# Altium PCB pcb 2022 prototip_2022-08-15.pcbdoc (part 1 of 2)
Units mm, origin at the board's own origin, x right, y up, seen from the top; angles counter-clockwise.
Board outline 345.4 x 226.4 mm, 2 copper layers (Top Layer, Bottom Layer); 44 components, 59 nets, 156 pads, 0 vias.
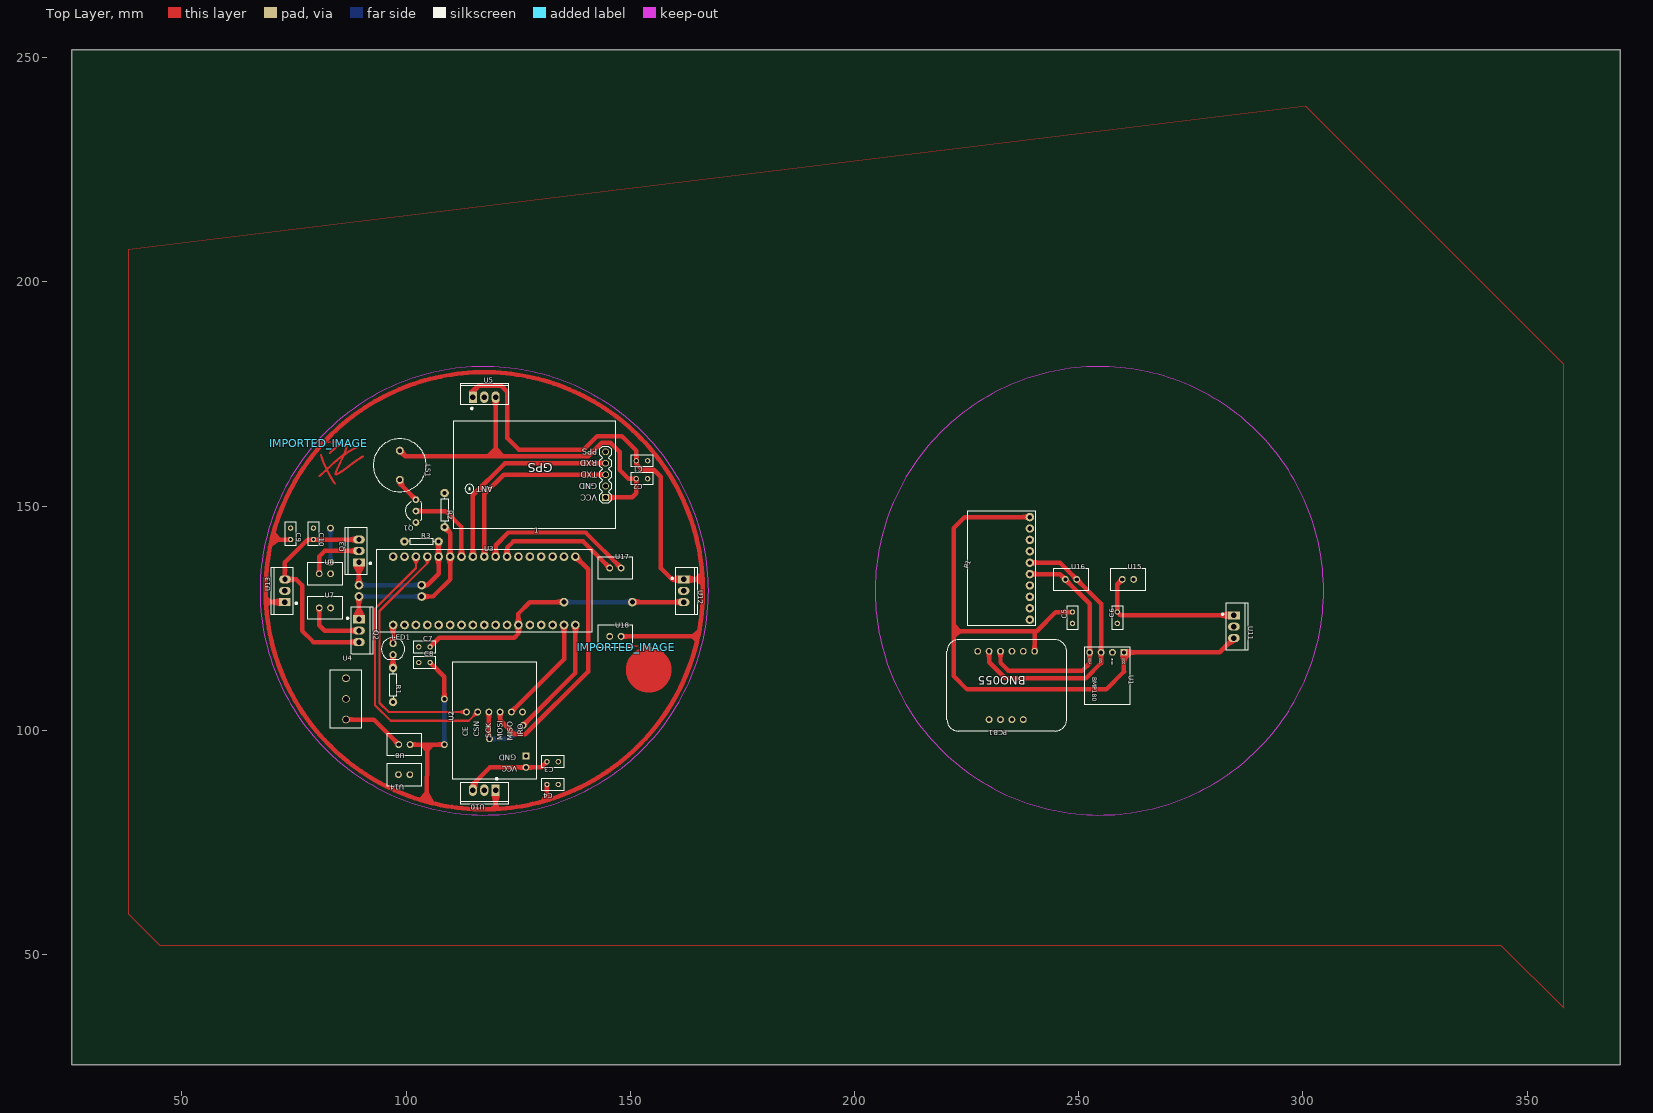
[diagram p0: Top Layer view]
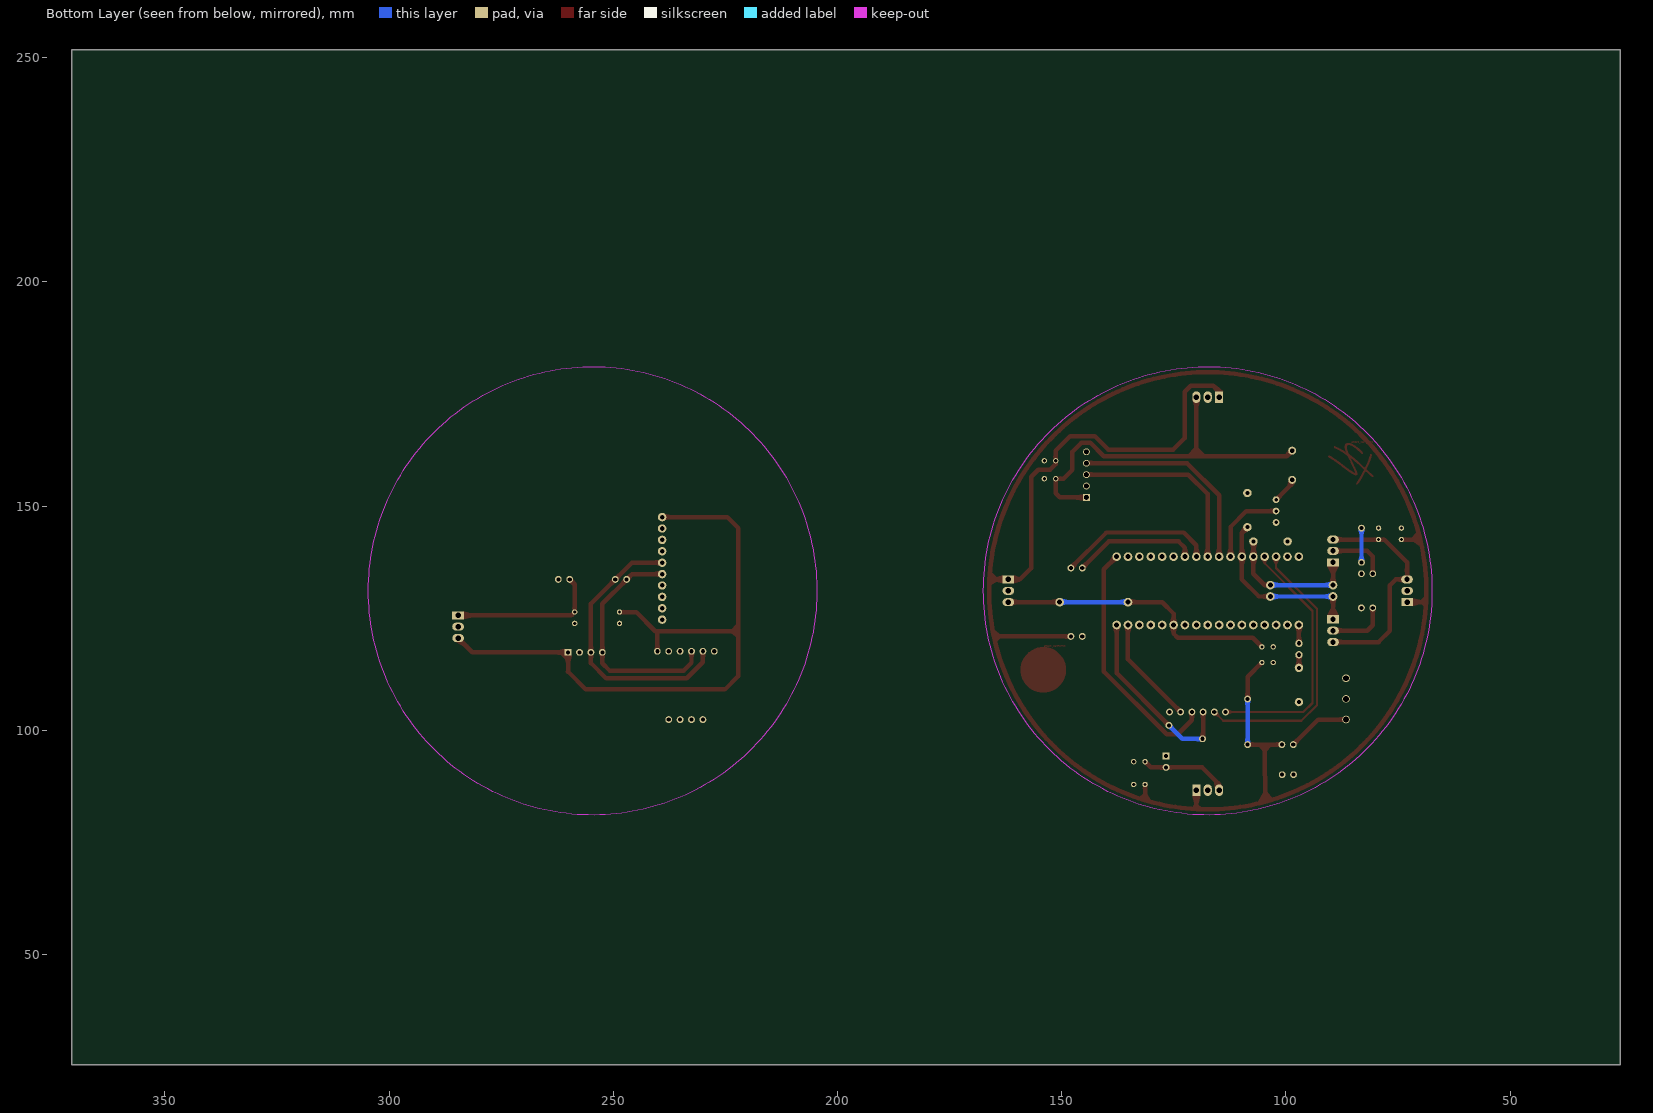
[diagram p1: Bottom Layer view, seen from below]

## Layer stack, top to bottom
Top Layer: signal copper (thickness not stored)
Dielectric: dielectric 0.32, FR-4, Dk 4.8
Bottom Layer: signal copper (thickness not stored)

## Board outline
370.8,25.4 25.4,25.4 25.4,251.8 370.8,251.8

## Components (designator, comment, footprint, x,y, rotation, side; value= is the part's Value field where it differs from the comment)
1 "GPS-RECEIVER-NEO6M" "GPS FOOTPRINT" 130.14,159.04 r180 top
C1 "0.33uf" RAD-0.1 152.6,160.1 r180 top
C2 "0.1uf" RAD-0.1 152.6,156.1 r180 top
C3 "0.1uf" RAD-0.1 132.68,93 r180 top
C4 "0.33uf" RAD-0.1 132.68,87.92 r180 top
C5 "0.1uf" RAD-0.1 248.6,125.1 r90 top
C6 "0.33uf" RAD-0.1 258.6,125.1 r90 top
C7 "0.1uf" RAD-0.1 104.1,118.6 r0 top
C8 "0.33uf" RAD-0.1 104.1,115.1 r0 top
C9 "0.33uf" RAD-0.1 74.26,143.8 r270 top
C10 "0.1uf" RAD-0.1 79.34,143.8 r270 top
IMPORTED_IMAGE "IMPORTED_IMAGE" IMPORTED_IMAGE#1 149.113,118.483 r0 top
IMPORTED_IMAGE "IMPORTED_IMAGE" IMPORTED_IMAGE#2 80.572,164.024 r0 top
LED1 "LED-TH-5mm_R" LED-TH_BD5.0_RED 97.1,118.1 r0 top
LS1 "BUZZER-PTH" BUZZER-12MM 98.6,159.1 r270 top
P1 "MPU6050 COPY" MPU6050 239.1,136.1 r90 top
PCB1 "BNO055" "BNO FOOTPRINT" 235.6,108.6 r180 top
Q1 "Transistor, PN2222A" GENERIC_TO-92 102.2,148.88 r180 top
Q2 "IRFZ44NPBF" TO-220-3_L10.0-W4.5-P2.54-L 89.5,122.21 r270 top
Q3 "IRFZ44NPBF" TO-220-3_L10.0-W4.5-P2.54-L 89.5,139.99 r90 top
R1 "1k" R_AXIAL-0.3 97.1,110.1 r270 top
R2 "10k" R_AXIAL-0.3 108.6,149.1 r270 top
R3 "10k" R_AXIAL-0.3 103.44,142.1 r0 top
U1 "BMP180" "BMP180 FOOTPRINT" 257.14,113.32 r270 top
U2 "NRF24L01_adapter3V3" NRF24L01_ADAPTER3V3 119.726,97.826 r90 top
U3 "ARDUINOMICRO" ARDUINOMICRO 117.44,131.1 r0 top
U4 "swich" NEW_FOOTPRINT 86.6,111.6 r0 top
U5 "LM7805" TO-220-3_L10.0-W4.5-P2.54-L 117.44,174.28 r0 top
U6 "eyleyici1" "JST- XH 2.54MM SOKET 2LI" 81.88,134.91 r0 top
U7 "eyleyici2" "JST- XH 2.54MM SOKET 2LI" 81.88,127.29 r0 top
U8 "pil" "JST- XH 2.54MM SOKET 2LI" 99.66,96.81 r180 top
U10 "LM7805" TO-220-3_L10.0-W4.5-P2.54-L 117.44,86.65 r180 top
U11 "LM7805" TO-220-3_L10.0-W4.5-P2.54-L 284.6,123.1 r270 top
U12 "LM7805" TO-220-3_L10.0-W4.5-P2.54-L 161.89,131.1 r270 top
U13 "LM7805" TO-220-3_L10.0-W4.5-P2.54-L 72.99,131.1 r90 top
U14 "gnd" "JST- XH 2.54MM SOKET 2LI" 99.6,90.1 r180 top
U15 "pil" "JST- XH 2.54MM SOKET 2LI" 260.95,133.64 r0 top
U16 "gnd" "JST- XH 2.54MM SOKET 2LI" 248.25,133.64 r0 top
U17 "eyleyici1" "JST- XH 2.54MM SOKET 2LI" 146.65,136.18 r0 top
U18 "eyleyici1" "JST- XH 2.54MM SOKET 2LI" 146.65,120.94 r0 top
? "" ? 81.442,112.551 r0 top
? "" ? 94.107,109.3 r0 top
? "" ? 78.537,104.7 r0 top
? "" ? 90.082,101.45 r0 top

## Footprints (in the part's own frame and the unit in brackets; to place one, negate y for a bottom-side part, rotate by r counter-clockwise, add the part's x,y. Pads: shape width x height; smd on the part's side, far side on the other; paste and mask are expansions set on the pad)
ARDUINOMICRO [mil]
  round 76 hole 43.4: P$1(-800,300) P$2(-700,300) P$3(-600,300) P$4(-500,300) P$5(-400,300) P$6(-300,300) P$7(-200,300) P$8(-100,300) P$9(0,300) P$10(100,300) P$11(200,300) P$12(500,-300) P$13(400,-300) P$14(500,300) P$15(600,300) P$16(700,300) P$17(800,300) P$18(800,-300) P$19(700,-300) P$20(600,-300) P$21(300,300) P$22(400,300) P$23(300,-300) P$24(200,-300) P$25(100,-300) P$26(0,-300) P$27(-100,-300) P$28(-200,-300) P$29(-300,-300) P$30(-400,-300) P$31(-500,-300) P$32(-600,-300) P$33(-700,-300) P$34(-800,-300)
  silkscreen extent -950,-360 950,360
"BMP180 FOOTPRINT" [mil]
  rect 60x60 hole 36: 1(-160,115)
  round 60 hole 36: 2(-160,15) 3(-160,-85) 4(-160,-185)
  silkscreen extent -210,-229 302,165
"BNO FOOTPRINT" [mil]
  round 60 hole 36: 1(-180,-355) 2(-80,-355) 3(20,-355) 4(120,-355) 5(220,-355) 6(320,-355) 7(-80,245) 8(20,245) 9(120,245) 10(220,245)
  silkscreen extent -460,-455 590,345
BUZZER-12MM [mil]
  round 70 hole 35.44 slot 35.45 at 0 deg: +(127.95,0) -(-127.95,0)
  silkscreen extent -232,-232 232,232
GENERIC_TO-92 [mil]
  round 60 hole 30: 1(0,100) 2(0,0) 3(0,-100)
  silkscreen extent -50,-80 93,80
"GPS FOOTPRINT" [mil]
  rect 59.37x59.37 hole 39.36: 1(-565,280)
  round 59.37 hole 39.36: 2(-565,180) 3(-565,80) 4(-565,-20) 5(-565,-120)
  silkscreen extent -650,-395 770,555
IMPORTED_IMAGE#1 [mm]
  Top Layer region: 574 vertices and 1 holes, not listed, extent 0,-10 10,0
  Top Layer region: 4.678,-9.475 4.637,-9.488 4.637,-9.451 4.637,-9.446 4.639,-9.439 4.641,-9.431 4.644,-9.421 4.649,-9.409 4.654,-9.396 4.659,-9.382 4.666,-9.367 4.673,-9.35 4.681,-9.333 4.689,-9.315 4.697,-9.296 4.707,-9.276 4.716,-9.257 4.726,-9.237 4.736,-9.216 4.836,-9.019 4.766,-8.858 4.752,-8.824 4.737,-8.79 4.722,-8.756 4.709,-8.723 4.696,-8.692 4.684,-8.665 4.675,-8.641 4.668,-8.623 4.638,-8.548 4.757,-8.548 4.837,-8.723 4.917,-8.898 4.928,-8.723 4.94,-8.548 5.036,-8.548 5.036,-8.689 5.036,-8.715 5.035,-8.746 5.034,-8.783 5.032,-8.824 5.03,-8.87 5.028,-8.918 5.026,-8.968 5.023,-9.019 5.02,-9.071 5.017,-9.123 5.014,-9.157 4.993,-9.482 4.903,-9.482 4.902,-9.132 4.811,-9.297 4.72,-9.461
  Top Layer region: 5.506,-9.447 5.485,-9.414 5.478,-9.397 5.47,-9.365 5.461,-9.32 5.45,-9.266 5.439,-9.203 5.428,-9.133 5.416,-9.06 5.405,-8.984 5.394,-8.909 5.384,-8.836 5.376,-8.767 5.368,-8.704 5.363,-8.65 5.36,-8.606 5.359,-8.574 5.36,-8.558 5.375,-8.518 5.481,-8.505 5.503,-8.502 5.527,-8.499 5.552,-8.496 5.576,-8.494 5.6,-8.491 5.622,-8.489 5.642,-8.487 5.659,-8.486 5.731,-8.481 5.749,-8.539 5.752,-8.552 5.756,-8.574 5.762,-8.602 5.768,-8.637 5.775,-8.677 5.782,-8.722 5.791,-8.771 5.799,-8.824 5.808,-8.879 5.817,-8.936 5.822,-8.975 5.879,-9.352 5.849,-9.38 5.845,-9.383 5.84,-9.386 5.833,-9.389 5.825,-9.392 5.816,-9.395 5.806,-9.398 5.794,-9.402 5.782,-9.405 5.769,-9.408 5.755,-9.411 5.741,-9.414 5.726,-9.417 5.71,-9.42 5.695,-9.423 5.679,-9.425 5.662,-9.427 hole: 1546682.439,1091336.789 1548529.273,1091608.569 1548529.273,1091608.569 1547547.817,1098899.385 1547547.817,1098899.385 1547194.249,1098860.777 1547194.249,1098860.777 1547111.295,1098849.86 1547111.295,1098849.86 1547010.913,1098833.639 1547010.913,1098833.639 1546896.94,1098812.905 1546896.94,1098812.905 1546773.212,1098788.451 1546773.212,1098788.451 1546643.568,1098761.067 1546643.568,1098761.067 1546511.842,1098731.547 1546511.842,1098731.547 1546381.873,1098700.681 1546381.873,1098700.681 1546257.497,1098669.261 1546257.497,1098669.261 1545674.567,1098516.607 1545674.567,1098516.607 1545674.567,1098151.101 1545674.567,1098151.101 1545676.365,1098102.442 1545676.365,1098102.442 1545690.219,1097943.424 1545690.219,1097943.424 1545716.568,1097710.898 1545716.568,1097710.898 1545753.995,1097415.375 1545753.995,1097415.375 1545801.085,1097067.365 1545801.085,1097067.365 1545856.42,1096677.377 1545856.42,1096677.377 1545918.583,1096255.923 1545918.583,1096255.923 1545986.157,1095813.513 1545986.157,1095813.513 1546205.379,1094418.124 1546205.379,1094418.124 1546408.577,1093118.059 1546408.577,1093118.059 1546525.467,1092363.457 1546525.467,1092363.457 1546682.439,1091336.789
  Top Layer region: 4.187,-9.405 3.9,-9.344 3.928,-9.265 4.133,-9.282 4.19,-8.998 4.095,-8.972 3.999,-8.945 4.026,-8.865 4.217,-8.865 4.24,-8.781 4.245,-8.763 4.249,-8.743 4.254,-8.722 4.258,-8.701 4.261,-8.68 4.264,-8.66 4.266,-8.641 4.267,-8.625 4.27,-8.552 4.092,-8.531 4.062,-8.439 4.224,-8.463 4.288,-8.473 4.342,-8.483 4.38,-8.491 4.397,-8.497 4.398,-8.509 4.394,-8.539 4.388,-8.583 4.378,-8.639 4.365,-8.706 4.351,-8.779 4.335,-8.858 4.318,-8.939 4.301,-9.02 4.283,-9.099 4.267,-9.173 4.251,-9.24 4.237,-9.297 4.225,-9.342 4.215,-9.372 4.209,-9.385
  Top Layer region: 6.487,-9.226 6.339,-9.277 6.309,-9.238 6.305,-9.233 6.301,-9.226 6.297,-9.218 6.292,-9.208 6.287,-9.197 6.281,-9.185 6.275,-9.171 6.269,-9.157 6.263,-9.142 6.257,-9.125 6.251,-9.109 6.244,-9.091 6.238,-9.073 6.231,-9.055 6.225,-9.036 6.219,-9.018 6.16,-8.837 6.264,-8.761 6.131,-8.604 5.998,-8.448 6.019,-8.414 6.04,-8.391 6.063,-8.381 6.072,-8.385 6.087,-8.398 6.107,-8.417 6.13,-8.442 6.157,-8.472 6.185,-8.505 6.215,-8.542 6.245,-8.58 6.275,-8.618 6.304,-8.656 6.33,-8.692 6.354,-8.725 6.374,-8.755 6.389,-8.78 6.399,-8.799 6.402,-8.811 6.402,-8.848 6.302,-8.848 6.302,-8.893 6.303,-8.904 6.305,-8.919 6.309,-8.937 6.313,-8.956 6.319,-8.977 6.325,-9 6.332,-9.022 6.339,-9.045 6.376,-9.151 6.447,-9.129 6.476,-9.12 6.501,-9.111 6.519,-9.103 6.529,-9.098 6.529,-9.096 6.528,-9.089 6.526,-9.078 6.522,-9.065 6.517,-9.048 6.511,-9.028 6.505,-9.005 6.497,-8.979 6.488,-8.951 6.478,-8.921 6.468,-8.889 6.457,-8.855 6.445,-8.82 6.432,-8.783 6.419,-8.744 6.406,-8.705 6.274,-8.32 6.294,-8.3 6.305,-8.293 6.318,-8.288 6.333,-8.287 6.347,-8.29 6.379,-8.301 6.524,-8.711 6.669,-9.121 6.652,-9.148 6.65,-9.151 6.646,-9.155 6.64,-9.159 6.634,-9.163 6.626,-9.167 6.617,-9.172 6.608,-9.177 6.597,-9.183 6.585,-9.188 6.573,-9.193 6.56,-9.199 6.546,-9.204 6.532,-9.21 6.517,-9.216 6.502,-9.221
  Top Layer region: 3.571,-9.181 3.571,-9.215 3.53,-9.215 3.525,-9.215 3.519,-9.214 3.512,-9.213 3.503,-9.211 3.493,-9.209 3.483,-9.206 3.472,-9.203 3.46,-9.199 3.447,-9.195 3.433,-9.191 3.42,-9.187 3.405,-9.182 3.391,-9.177 3.376,-9.172 3.362,-9.166 3.347,-9.161 3.204,-9.106 3.204,-9.014 3.279,-9.032 3.354,-9.05 3.466,-8.74 3.489,-8.677 3.512,-8.614 3.534,-8.555 3.554,-8.5 3.572,-8.451 3.587,-8.409 3.599,-8.377 3.607,-8.356 3.619,-8.329 3.632,-8.309 3.646,-8.294 3.661,-8.284 3.676,-8.281 3.691,-8.284 3.705,-8.293 3.717,-8.309 3.735,-8.337 3.589,-8.718 3.443,-9.098 3.507,-9.122 3.531,-9.134 3.552,-9.15 3.566,-9.166
  Top Layer region: 2.62,-8.812 2.463,-8.71 2.305,-8.607 2.345,-8.542 2.417,-8.56 2.488,-8.578 2.704,-8.246 2.778,-8.134 2.835,-8.049 2.88,-7.988 2.914,-7.948 2.939,-7.926 2.958,-7.921 2.974,-7.929 2.989,-7.949 3.011,-7.985 2.789,-8.319 2.567,-8.654 2.627,-8.699 2.688,-8.743
  Top Layer region: 7.509,-8.687 7.518,-8.731 7.417,-8.731 7.105,-8.402 6.792,-8.073 6.884,-8.016 6.954,-8.083 7.025,-8.149 7.08,-8.128 7.091,-8.123 7.101,-8.118 7.11,-8.112 7.117,-8.106 7.123,-8.1 7.127,-8.093 7.13,-8.085 7.132,-8.077 7.133,-8.068 7.132,-8.058 7.13,-8.047 7.126,-8.035 7.122,-8.023 7.116,-8.009 7.109,-7.993 7.1,-7.977 7.065,-7.912 7.086,-7.879 7.095,-7.866 7.108,-7.856 7.121,-7.849 7.133,-7.846 7.16,-7.846 7.33,-8.245 7.364,-8.326 7.397,-8.403 7.426,-8.474 7.453,-8.539 7.475,-8.594 7.492,-8.638 7.504,-8.67 hole: 1563093.887,1100995.647 1564356.521,1099734.029 1564356.521,1099734.029 1563812.707,1101069.561 1563812.707,1101069.561 1563584,1101606.835 1563584,1101606.835 1563363.413,1102082.386 1563363.413,1102082.386 1563176.02,1102444.59 1563176.02,1102444.59 1563046.897,1102641.821 1563046.897,1102641.821 1562825.155,1102878.295 1562825.155,1102878.295 1561831.507,1102257.265 1561831.507,1102257.265 1563093.887,1100995.647
  Top Layer region: 465 vertices and 2 holes, not listed, extent 1.622,-8.421 8.416,-1.571
  Top Layer region: 8.141,-8.224 8.048,-8.314 7.939,-8.314 7.8,-8.118 7.872,-8.074 7.996,-8.186 8.141,-8.108 8.069,-8.032 7.998,-7.956 7.588,-7.913 7.495,-7.823 7.402,-7.734 7.402,-7.633 7.583,-7.443 7.711,-7.462 7.777,-7.551 7.843,-7.639 7.819,-7.679 7.794,-7.718 7.633,-7.566 7.577,-7.623 7.52,-7.68 7.586,-7.746 7.652,-7.812 8.069,-7.869 8.151,-7.947 8.234,-8.025 8.234,-8.134
  Top Layer region: 2.014,-8.178 1.903,-8.259 1.834,-8.189 2.089,-7.797 2.343,-7.404 2.417,-7.478 2.328,-7.644 2.371,-7.696 2.414,-7.748 2.491,-7.697 2.524,-7.677 2.556,-7.661 2.584,-7.65 2.603,-7.646 2.638,-7.646 2.634,-7.73 2.354,-7.932 2.246,-8.01 2.143,-8.084 2.059,-8.146 hole: 1511265.441,1104147.533 1514332.237,1106411.689 1514332.237,1106411.689 1514242.067,1106724.871 1514242.067,1106724.871 1514178.277,1106856.086 1514178.277,1106856.086 1514070.839,1106981.919 1514070.839,1106981.919 1513934.779,1107088.131 1513934.779,1107088.131 1513785.121,1107160.481 1513785.121,1107160.481 1513418.091,1107283.163 1513418.091,1107283.163 1511265.441,1104147.533
  Top Layer region: 1.94,-7.659 1.592,-7.947 1.557,-7.91 1.522,-7.874 1.652,-7.76 1.702,-7.716 1.74,-7.68 1.764,-7.655 1.769,-7.646 1.763,-7.648 1.75,-7.65 1.731,-7.655 1.708,-7.66 1.68,-7.667 1.649,-7.675 1.616,-7.684 1.58,-7.694 1.405,-7.74 1.368,-7.679 1.389,-7.646 1.4,-7.633 1.415,-7.622 1.433,-7.615 1.451,-7.613 1.456,-7.612 1.463,-7.612 1.471,-7.61 1.481,-7.609 1.491,-7.607 1.503,-7.604 1.516,-7.601 1.53,-7.598 1.545,-7.594 1.56,-7.591 1.576,-7.586 1.593,-7.582 1.609,-7.577 1.627,-7.573 1.644,-7.568 1.661,-7.563 1.829,-7.513 1.934,-7.277 2.039,-7.042 2.072,-7.062 2.086,-7.075 2.095,-7.093 2.101,-7.115 2.104,-7.14 2.102,-7.165 2.097,-7.19 2.088,-7.212 2.075,-7.23 2.071,-7.234 2.067,-7.239 2.063,-7.245 2.059,-7.253 2.054,-7.261 2.049,-7.27 2.043,-7.279 2.038,-7.29 2.032,-7.301 2.027,-7.313 2.021,-7.325 2.015,-7.337 2.009,-7.35 2.003,-7.363 1.998,-7.376 1.992,-7.389 1.941,-7.515 2.088,-7.394 2.235,-7.273 2.274,-7.297 2.281,-7.302 2.287,-7.307 2.292,-7.313 2.295,-7.318 2.296,-7.322 2.296,-7.327 2.295,-7.332 2.294,-7.337 2.291,-7.343 2.287,-7.349 2.283,-7.356 2.277,-7.363 2.27,-7.372 2.261,-7.381 2.252,-7.39 2.241,-7.401 2.229,-7.413 2.215,-7.425 2.2,-7.439 2.183,-7.454 2.165,-7.47 2.145,-7.487 2.124,-7.505 2.088,-7.535 2.049,-7.568 2.005,-7.605
  Top Layer region: 8.568,-7.726 8.419,-7.62 8.323,-7.552 8.205,-7.468 8.089,-7.385 7.872,-7.229 7.87,-7.182 7.87,-7.176 7.871,-7.17 7.873,-7.163 7.876,-7.155 7.879,-7.146 7.883,-7.136 7.888,-7.126 7.893,-7.116 7.899,-7.105 7.906,-7.094 7.913,-7.082 7.92,-7.07 7.928,-7.058 7.936,-7.047 7.944,-7.035 7.953,-7.023 8.038,-6.912 8.132,-6.912 8.465,-7.154 8.798,-7.396 8.801,-7.479 8.759,-7.478 8.753,-7.477 8.744,-7.473 8.732,-7.468 8.718,-7.46 8.701,-7.45 8.682,-7.438 8.66,-7.425 8.637,-7.41 8.611,-7.394 8.585,-7.376 8.557,-7.357 8.527,-7.337 8.497,-7.315 8.465,-7.293 8.433,-7.271 8.401,-7.247 8.084,-7.017 7.97,-7.162 8.025,-7.203 8.11,-7.265 8.248,-7.366 8.351,-7.44 8.641,-7.652
  Top Layer region: 1.105,-7.312 1.106,-7.229 1.464,-7.006 1.536,-6.961 1.606,-6.919 1.671,-6.881 1.729,-6.847 1.779,-6.82 1.819,-6.799 1.848,-6.785 1.863,-6.78 1.905,-6.778 1.905,-6.874 1.542,-7.093 1.468,-7.137 1.398,-7.178 1.333,-7.215 1.275,-7.248 1.225,-7.275 1.185,-7.295 1.157,-7.308 1.142,-7.312
  Top Layer region: 98 vertices and 1 holes, not listed, extent 8.206,-6.978 9.186,-6.284
  Top Layer region: 0.892,-6.823 0.87,-6.82 0.857,-6.81 0.849,-6.793 0.838,-6.757 1.038,-6.611 1.116,-6.554 1.18,-6.504 1.223,-6.468 1.239,-6.451 1.238,-6.45 1.235,-6.449 1.23,-6.448 1.224,-6.447 1.216,-6.447 1.207,-6.447 1.196,-6.447 1.184,-6.448 1.171,-6.449 1.157,-6.45 1.142,-6.451 1.126,-6.452 1.109,-6.453 1.091,-6.455 1.073,-6.457 1.055,-6.459 1.036,-6.461 1.017,-6.463 0.997,-6.466 0.978,-6.468 0.959,-6.47 0.939,-6.473 0.921,-6.476 0.902,-6.478 0.884,-6.481 0.866,-6.484 0.849,-6.487 0.833,-6.49 0.817,-6.493 0.803,-6.495 0.79,-6.498 0.777,-6.501 0.699,-6.52 0.722,-6.398 1.105,-6.24 1.183,-6.209 1.257,-6.179 1.326,-6.152 1.388,-6.128 1.441,-6.108 1.484,-6.093 1.514,-6.083 1.53,-6.08 1.572,-6.077 1.572,-6.169 1.372,-6.244 1.349,-6.252 1.328,-6.26 1.308,-6.268 1.29,-6.275 1.273,-6.282 1.257,-6.288 1.244,-6.294 1.231,-6.299 1.22,-6.304 1.211,-6.309 1.203,-6.313 1.196,-6.317 1.191,-6.32 1.188,-6.323 1.186,-6.326 1.185,-6.328 1.186,-6.33 1.189,-6.331 1.193,-6.333 1.198,-6.334 1.205,-6.334 1.213,-6.335 1.223,-6.335 1.235,-6.335 1.248,-6.334 1.262,-6.334 1.278,-6.333 1.295,-6.331 1.314,-6.33 1.335,-6.328 1.357,-6.326 1.38,-6.324 1.588,-6.306 1.499,-6.376 1.48,-6.391 1.459,-6.408 1.436,-6.426 1.414,-6.444 1.391,-6.463 1.37,-6.48 1.35,-6.497 1.333,-6.511 1.255,-6.576 1.467,-6.492 1.506,-6.477 1.54,-6.464 1.571,-6.452 1.598,-6.443 1.622,-6.436 1.642,-6.431 1.659,-6.428 1.674,-6.426 1.685,-6.427 1.694,-6.43 1.7,-6.434 1.704,-6.44 1.705,-6.449 1.704,-6.459 1.701,-6.471 1.696,-6.486 1.679,-6.53 1.301,-6.679 1.165,-6.732 1.06,-6.772 0.983,-6.8 0.929,-6.816
  Top Layer region: 9.332,-6.205 9.325,-6.205 9.315,-6.205 9.303,-6.204 9.29,-6.203 9.275,-6.201 9.258,-6.199 9.24,-6.196 9.221,-6.193 9.201,-6.189 9.179,-6.185 9.157,-6.18 9.134,-6.176 9.111,-6.17 9.087,-6.165 9.063,-6.159 8.828,-6.101 8.849,-5.959 8.87,-5.816 8.743,-5.795 8.717,-5.79 8.69,-5.784 8.665,-5.778 8.64,-5.771 8.618,-5.764 8.599,-5.758 8.583,-5.751 8.571,-5.745 8.526,-5.717 8.573,-5.64 8.632,-5.657 8.662,-5.665 8.711,-5.677 8.775,-5.694 8.853,-5.713 8.939,-5.735 9.032,-5.757 9.051,-5.762 9.125,-5.781 9.195,-5.799 9.259,-5.816 9.316,-5.832 9.365,-5.846 9.403,-5.858 9.429,-5.867 9.441,-5.873 9.465,-5.894 9.421,-6.042 9.377,-6.19 9.337,-6.204 hole: 1583748.659,1123558.721 1584028.059,1124000.173 1584028.059,1124000.173 1584136.946,1124203.338 1584136.946,1124203.338 1584226.878,1124430.1 1584226.878,1124430.1 1584288.52,1124652.719 1584288.52,1124652.719 1584312.539,1124843.453 1584312.539,1124843.453 1584317.619,1125245.281 1584317.619,1125245.281 1583068.447,1125593.007 1583068.447,1125593.007 1582805.607,1125662.896 1582805.607,1125662.896 1582537.401,1125728.163 1582537.401,1125728.163 1582271.343,1125787.375 1582271.343,1125787.375 1582014.95,1125839.102 1582014.95,1125839.102 1581775.738,1125881.91 1581775.738,1125881.91 1581561.223,1125914.369 1581561.223,1125914.369 1581378.92,1125935.047 1581378.92,1125935.047 1581236.345,1125942.511 1581236.345,1125942.511 1580653.415,1125944.543 1580653.415,1125944.543 1580653.415,1124775.889 1580653.415,1124775.889 1580661.445,1124756.136 1580661.445,1124756.136 1580685.004,1124731.595 1580685.004,1124731.595 1580723.299,1124702.618 1580723.299,1124702.618 1580775.537,1124669.562 1580775.537,1124669.562 1580840.925,1124632.781 1580840.925,1124632.781 1580918.667,1124592.63 1580918.667,1124592.63 1581007.971,1124549.462 1581007.971,1124549.462 1581108.043,1124503.633 1581108.043,1124503.633 1581218.09,1124455.497 1581218.09,1124455.497 1581337.317,1124405.409 1581337.317,1124405.409 1581464.932,1124353.723 1581464.932,1124353.723 1581600.141,1124300.794 1581600.141,1124300.794 1581742.149,1124246.977 1581742.149,1124246.977 1581890.163,1124192.625 1581890.163,1124192.625 1582043.391,1124138.095 1582043.391,1124138.095 1582201.037,1124083.739 1582201.037,1124083.739 1583748.659,1123558.721
  Top Layer region: 0.539,-5.943 0.539,-5.854 0.98,-5.755 1.422,-5.656 1.445,-5.691 1.469,-5.726 1.445,-5.747 1.432,-5.754 1.404,-5.764 1.364,-5.776 1.314,-5.79 1.255,-5.805 1.19,-5.821 1.12,-5.838 1.047,-5.856 0.974,-5.872 0.902,-5.888 0.833,-5.903 0.769,-5.916 0.713,-5.927 0.665,-5.936 0.629,-5.941 0.605,-5.943
  Top Layer region: 1.012,-5.344 0.869,-5.423 0.679,-5.318 0.489,-5.212 0.489,-4.758 0.656,-4.667 0.676,-4.656 0.696,-4.647 0.715,-4.638 0.734,-4.629 0.753,-4.622 0.772,-4.616 0.791,-4.61 0.809,-4.606 0.827,-4.602 0.845,-4.599 0.863,-4.597 0.88,-4.596 0.898,-4.595 0.915,-4.596 0.932,-4.597 0.949,-4.6 0.966,-4.603 0.983,-4.607 1,-4.612 1.017,-4.618 1.034,-4.625 1.05,-4.633 1.067,-4.641 1.084,-4.651 1.1,-4.661 1.117,-4.672 1.134,-4.684 1.151,-4.698 1.167,-4.712 1.184,-4.727 1.201,-4.742 1.219,-4.759 1.272,-4.813 1.272,-5.165 1.214,-5.215 1.207,-5.221 1.199,-5.227 1.19,-5.234 1.18,-5.241 1.169,-5.249 1.157,-5.257 1.144,-5.265 1.13,-5.274 1.116,-5.283 1.102,-5.292 1.087,-5.301 1.072,-5.31 1.057,-5.319 1.042,-5.328 1.027,-5.336 hole: 1499886.241,1133725.579 1500476.283,1134509.423 1500476.283,1134509.423 1501066.071,1135293.267 1501066.071,1135293.267 1499964.473,1135293.267 1499964.473,1135293.267 1500179.456,1135855.133 1500179.456,1135855.133 1500219.547,1135964.561 1500219.547,1135964.561 1500249.237,1136056.511 1500249.237,1136056.511 1500266.178,1136130.057 1500266.178,1136130.057 1500268.024,1136184.269 1500268.024,1136184.269 1500252.428,1136218.22 1500252.428,1136218.22 1500237.356,1136227.308 1500237.356,1136227.308 1500217.044,1136230.982 1500217.044,1136230.982 1500191.197,1136229.127 1500191.197,1136229.127 1500159.524,1136221.627 1500159.524,1136221.627 1500121.731,1136208.366 1500121.731,1136208.366 1500077.523,1136189.227 1500077.523,1136189.227 1500026.609,1136164.095 1500026.609,1136164.095 1499968.694,1136132.855 1499968.694,1136132.855 1499903.486,1136095.388 1499903.486,1136095.388 1499750.014,1136001.316 1499750.014,1136001.316 1499563.848,1135880.952 1499563.848,1135880.952 1499342.639,1135733.367 1499342.639,1135733.367 1499084.043,1135557.633 1499084.043,1135557.633 1498785.712,1135352.822 1498785.712,1135352.822 1498445.299,1135118.007 1498445.299,1135118.007 1498425.57,1135052.888 1498425.57,1135052.888 1498439.108,1134922.046 1498439.108,1134922.046 1498482.411,1134744.532 1498482.411,1134744.532 1498551.979,1134539.395 1498551.979,1134539.395 1498749.337,1134023.521 1498749.337,1134023.521 1499317.789,1133874.423 1499317.789,1133874.423 1499886.241,1133725.579 hole: 1501221.265,1135627.023 1501325.088,1135725.163 1501325.088,1135725.163 1501368.331,1135961.033 1501368.331,1135961.033 1501340.455,1136090.696 1501340.455,1136090.696 1501264.572,1136196.904 1501264.572,1136196.904 1501152.304,1136268.679 1501152.304,1136268.679 1501015.271,1136295.043 1501015.271,1136295.043 1500662.719,1136295.043 1500662.719,1136295.043 1500868.459,1135961.033 1500868.459,1135961.033 1501057.054,1135725.163 1501057.054,1135725.163 1501221.265,1135627.023
  Top Layer region: 9.235,-5.205 9.066,-5.309 9.008,-5.308 9.002,-5.308 8.994,-5.306 8.984,-5.304 8.973,-5.3 8.962,-5.296 8.949,-5.291 8.935,-5.285 8.921,-5.279 8.906,-5.271 8.891,-5.264 8.875,-5.255 8.858,-5.247 8.842,-5.238 8.825,-5.228 8.809,-5.218 8.792,-5.208 8.634,-5.108 8.634,-4.673 8.947,-4.474 9.084,-4.479 9.234,-4.571 9.384,-4.662 9.403,-5.101 hole: 1580878.967,1134815.747 1581369.187,1134627.279 1581369.187,1134627.279 1582182.749,1135460.399 1582182.749,1135460.399 1581486.027,1136795.931 1581486.027,1136795.931 1580803.783,1136814.981 1580803.783,1136814.981 1580121.285,1136834.539 1580121.285,1136834.539 1580255.143,1135919.377 1580255.143,1135919.377 1580389.255,1135004.215 1580389.255,1135004.215 1580878.967,1134815.747
  Top Layer region: 61 vertices and 2 holes, not listed, extent 5.799,-4.918 6.601,-4.063
  Top Layer region: 172 vertices and 1 holes, not listed, extent 5.006,-4.274 6.538,-2.371
  Top Layer region: 1.439,-4.194 1.439,-4.24 1.386,-4.24 1.375,-4.24 1.358,-4.237 1.337,-4.234 1.311,-4.229 1.28,-4.222 1.244,-4.215 1.204,-4.206 1.16,-4.195 1.111,-4.184 1.058,-4.171 1.001,-4.157 0.94,-4.142 0.876,-4.125 0.808,-4.108 0.736,-4.089 0.661,-4.069 0.532,-4.036 0.555,-3.913 0.561,-3.888 0.567,-3.861 0.574,-3.835 0.581,-3.809 0.588,-3.786 0.596,-3.764 0.603,-3.746 0.61,-3.732 0.623,-3.709 0.637,-3.69 0.649,-3.677 0.658,-3.673 0.672,-3.674 0.694,-3.678 0.721,-3.683 0.754,-3.691 0.791,-3.7 0.831,-3.71 0.873,-3.721 0.915,-3.732 0.957,-3.744 0.998,-3.755 1.036,-3.767 1.071,-3.777 1.1,-3.787 1.124,-3.795 1.141,-3.802 1.15,-3.807 1.177,-3.832 1.145,-3.95 1.112,-4.068 1.439,-4.147 hole: 1500550.871,1144500.287 1500720.743,1144494.995 1500720.743,1144494.995 1500866.463,1144504.141 1500866.463,1144504.141 1500989.712,1144528.199 1500989.712,1144528.199 1501092.17,1144567.64 1501092.17,1144567.64 1501175.517,1144622.935 1501175.517,1144622.935 1501241.432,1144694.557 1501241.432,1144694.557 1501291.595,1144782.977 1501291.595,1144782.977 1501327.687,1144888.667 1501327.687,1144888.667 1501351.387,1145012.099 1501351.387,1145012.099 1501364.375,1145153.744 1501364.375,1145153.744 1501368.331,1145314.075 1501368.331,1145314.075 1501368.331,1145946.281 1501368.331,1145946.281 1500118.905,1146294.007 1500118.905,1146294.007 1499856.065,1146363.907 1499856.065,1146363.907 1499587.859,1146429.203 1499587.859,1146429.203 1499321.801,1146488.456 1499321.801,1146488.456 1499065.408,1146540.229 1499065.408,1146540.229 1498826.196,1146583.084 1498826.196,1146583.084 1498611.681,1146615.583 1498611.681,1146615.583 1498429.378,1146636.29 1498429.378,1146636.29 1498286.803,1146643.765 1498286.803,1146643.765 1497703.619,1146645.543 1497703.619,1146645.543 1497703.619,1145088.523 1497703.619,1145088.523 1499280.451,1144726.827 1499280.451,1144726.827 1499596.276,1144656.415 1499596.276,1144656.415 1499879.551,1144598.083 1499879.551,1144598.083 1500131.955,1144552.303 1500131.955,1144552.303 1500355.169,1144519.547 1500355.169,1144519.547 1500550.871,1144500.287
  Top Layer region: 8.534,-4.216 8.534,-4.114 8.792,-4.057 8.82,-4.051 8.848,-4.045 8.876,-4.039 8.906,-4.032 8.935,-4.025 8.965,-4.018 8.995,-4.011 9.024,-4.005 9.052,-3.998 9.08,-3.991 9.107,-3.985 9.132,-3.978 9.156,-3.973 9.178,-3.967 9.199,-3.962 9.217,-3.957 9.282,-3.941 9.334,-3.929 9.375,-3.923 9.405,-3.923 9.427,-3.927 9.441,-3.938 9.448,-3.954 9.45,-3.975 9.45,-4.022 9.117,-4.099 9.083,-4.107 9.048,-4.115 9.013,-4.123 8.978,-4.131 8.944,-4.138 8.91,-4.145 8.877,-4.153 8.845,-4.159 8.815,-4.166 8.786,-4.172 8.759,-4.177 8.734,-4.182 8.711,-4.187 8.691,-4.19 8.674,-4.194 8.659,-4.196
  Top Layer region: 8.473,-3.798 8.428,-3.816 8.451,-3.7 8.634,-3.619 8.817,-3.538 8.434,-3.58 8.434,-3.55 8.436,-3.543 8.442,-3.534 8.45,-3.524 8.461,-3.512 8.475,-3.5 8.49,-3.488 8.507,-3.476 8.526,-3.464 8.546,-3.451 8.568,-3.436 8.591,-3.42 8.615,-3.404 8.639,-3.387 8.661,-3.37 8.682,-3.354 8.701,-3.339 8.784,-3.27 8.591,-3.354 8.551,-3.37 8.511,-3.387 8.473,-3.402 8.438,-3.415 8.406,-3.427 8.378,-3.436 8.356,-3.443 8.341,-3.446 8.284,-3.456 8.284,-3.369 8.667,-3.205 8.803,-3.148 8.909,-3.104 8.989,-3.073 9.048,-3.054 9.09,-3.045 9.118,-3.045 9.136,-3.054 9.149,-3.07 9.169,-3.102 8.943,-3.274 8.717,-3.446 8.901,-3.42 8.939,-3.414 8.979,-3.409 9.019,-3.404 9.058,-3.4 9.095,-3.397 9.129,-3.394 9.157,-3.392 9.181,-3.391 9.277,-3.389 9.303,-3.464 8.91,-3.622 8.754,-3.685 8.62,-3.739 8.521,-3.779
  Top Layer region: 1.638,-3.561 1.638,-3.606 1.605,-3.606 1.601,-3.605 1.593,-3.603 1.582,-3.599 1.569,-3.594 1.553,-3.588 1.534,-3.581 1.514,-3.573 1.491,-3.563 1.466,-3.553 1.44,-3.542 1.412,-3.531 1.383,-3.518 1.353,-3.505 1.322,-3.492 1.29,-3.478 1.258,-3.464 1.226,-3.45 1.193,-3.436 1.16,-3.421 1.128,-3.407 1.096,-3.392 1.065,-3.378 1.035,-3.365 1.005,-3.351 0.977,-3.338 0.95,-3.326 0.925,-3.314 0.902,-3.303 0.881,-3.293 0.862,-3.283 0.845,-3.275 0.831,-3.267 0.772,-3.236 0.856,-3.071 0.94,-2.905 0.972,-2.905 0.997,-2.907 1.025,-2.913 1.056,-2.923 1.089,-2.935 1.122,-2.951 1.155,-2.968 1.189,-2.987 1.221,-3.007 1.251,-3.029 1.279,-3.05 1.304,-3.071 1.325,-3.092 1.341,-3.112 1.353,-3.13 1.358,-3.146 1.357,-3.16 1.343,-3.199 1.416,-3.218 1.424,-3.22 1.433,-3.222 1.444,-3.224 1.455,-3.226 1.468,-3.228 1.481,-3.229 1.494,-3.231 1.509,-3.232 1.524,-3.234 1.539,-3.235 1.554,-3.236 1.569,-3.237 1.585,-3.237 1.6,-3.238 1.615,-3.238 1.63,-3.238 1.772,-3.239 1.772,-3.339 1.663,-3.339 1.651,-3.338 1.638,-3.338 1.623,-3.338 1.608,-3.337 1.591,-3.336 1.573,-3.335 1.555,-3.334 1.536,-3.332 1.516,-3.331 1.497,-3.329 1.477,-3.327 1.457,-3.325 1.437,-3.324 1.418,-3.322 1.399,-3.319 1.381,-3.317 1.206,-3.296 1.245,-3.141 1.122,-3.082 0.999,-3.023 0.943,-3.1 0.932,-3.115 0.926,-3.125 0.923,-3.131 0.92,-3.137 0.918,-3.143 0.917,-3.149 0.916,-3.155 0.917,-3.16 0.919,-3.166 0.922,-3.171 0.926,-3.177 0.932,-3.182 0.938,-3.188 0.946,-3.195 0.956,-3.201 0.967,-3.208 0.979,-3.215 0.993,-3.223 1.009,-3.231 1.027,-3.24 1.046,-3.249 1.067,-3.259 1.09,-3.27 1.129,-3.287 1.172,-3.307 1.273,-3.352 1.638,-3.515
  Top Layer region: 5.733,-3.318 5.664,-3.406 5.436,-3.406 5.369,-3.339 5.303,-3.272 5.303,-3.042 5.377,-2.99 5.451,-2.938 5.613,-2.938 5.708,-3.044 5.718,-3.056 5.728,-3.067 5.737,-3.078 5.745,-3.088 5.753,-3.098 5.76,-3.107 5.766,-3.116 5.772,-3.124 5.777,-3.133 5.782,-3.141 5.786,-3.149 5.789,-3.156 5.792,-3.164 5.794,-3.171 5.796,-3.178 5.797,-3.185 5.797,-3.193 5.797,-3.2 5.796,-3.207 5.795,-3.214 5.793,-3.221 5.79,-3.229 5.787,-3.236 5.783,-3.244 5.779,-3.252 5.774,-3.261 5.769,-3.269 5.763,-3.278 5.756,-3.287 5.749,-3.297 5.742,-3.307 hole: 1546741.113,1151921.631 1547402.783,1152584.571 1547402.783,1152584.571 1547166.055,1153816.471 1547166.055,1153816.471 1546160.469,1154010.527 1546160.469,1154010.527 1545751.021,1153600.063 1545751.021,1153600.063 1545591.997,1153408.341 1545591.997,1153408.341 1545461.81,1153189.472 1545461.81,1153189.472 1545373.867,1152970.413 1545373.867,1152970.413 1545341.573,1152778.119 1545341.573,1152778.119 1545341.573,1152366.639 1545341.573,1152366.639 1546741.113,1151921.631
  Top Layer region: 8.515,-2.872 8.129,-3.113 8.09,-3.074 8.077,-3.061 8.071,-3.055 8.069,-3.05 8.068,-3.045 8.069,-3.04 8.071,-3.036 8.074,-3.031 8.078,-3.026 8.083,-3.021 8.09,-3.015 8.098,-3.009 8.108,-3.001 8.119,-2.993 8.132,-2.984 8.146,-2.975 8.171,-2.958 8.201,-2.939 8.235,-2.917 8.274,-2.893 8.334,-2.856 8.464,-2.775 8.843,-2.539 8.872,-2.557 8.88,-2.563 8.886,-2.568 8.89,-2.572 8.892,-2.576 8.894,-2.581 8.895,-2.585 8.895,-2.59 8.894,-2.595 8.892,-2.601 8.889,-2.606 8.884,-2.613 8.879,-2.619 8.873,-2.626 8.865,-2.634 8.856,-2.642 8.846,-2.651 8.834,-2.66 8.822,-2.67 8.807,-2.681 8.792,-2.692 8.775,-2.704 8.756,-2.717 8.736,-2.73 8.714,-2.745 8.691,-2.76 8.666,-2.776 8.639,-2.793 8.611,-2.811 8.565,-2.84
  Top Layer region: 1.93,-2.994 1.912,-3.005 1.908,-3.004 1.901,-3.001 1.891,-2.996 1.88,-2.989 1.865,-2.98 1.849,-2.969 1.831,-2.957 1.81,-2.944 1.789,-2.929 1.765,-2.913 1.741,-2.896 1.715,-2.877 1.688,-2.858 1.66,-2.838 1.632,-2.818 1.603,-2.796 1.544,-2.753 1.487,-2.711 1.432,-2.671 1.381,-2.634 1.336,-2.601 1.297,-2.573 1.267,-2.552 1.246,-2.538 1.172,-2.487 1.231,-2.396 1.572,-2.64 1.913,-2.884 1.971,-2.805 1.978,-2.794 1.985,-2.784 1.988,-2.778 1.991,-2.772 1.993,-2.766 1.995,-2.76 1.995,-2.754 1.995,-2.748 1.993,-2.742 1.991,-2.736 1.988,-2.729 1.983,-2.722 1.978,-2.715 1.971,-2.707 1.963,-2.699 1.953,-2.69 1.943,-2.68 1.931,-2.67 1.917,-2.659 1.902,-2.647 1.885,-2.635 1.867,-2.621 1.847,-2.606 1.813,-2.582 1.776,-2.555 1.688,-2.492 1.372,-2.265 1.372,-2.163 1.419,-2.181 1.44,-2.192 1.472,-2.211 1.513,-2.238 1.563,-2.272 1.619,-2.31 1.68,-2.353 1.743,-2.398 1.807,-2.444 1.87,-2.49 1.93,-2.535 1.986,-2.578 2.036,-2.616 2.078,-2.649 2.11,-2.676 2.131,-2.695 2.138,-2.705 2.13,-2.728 2.107,-2.767 2.074,-2.816 2.036,-2.869 1.996,-2.92 1.959,-2.963
  Top Layer region: 8.07,-2.576 7.968,-2.805 7.937,-2.805 7.923,-2.802 7.909,-2.796 7.897,-2.787 7.887,-2.776 7.87,-2.747 7.949,-2.584 7.957,-2.565 7.966,-2.548 7.973,-2.532 7.98,-2.517 7.986,-2.503 7.992,-2.489 7.997,-2.478 8.001,-2.467 8.005,-2.457 8.008,-2.448 8.01,-2.44 8.011,-2.433 8.012,-2.427 8.012,-2.423 8.011,-2.419 8.01,-2.416 8.008,-2.414 8.005,-2.414 8.001,-2.414 7.997,-2.415 7.992,-2.417 7.986,-2.42 7.979,-2.424 7.972,-2.429 7.963,-2.435 7.954,-2.441 7.945,-2.449 7.934,-2.457 7.923,-2.467 7.911,-2.477 7.898,-2.488 7.884,-2.5 7.764,-2.606 7.733,-2.586 7.725,-2.581 7.718,-2.575 7.713,-2.569 7.711,-2.565 7.709,-2.561 7.708,-2.556 7.708,-2.551 7.709,-2.545 7.71,-2.54 7.713,-2.533 7.717,-2.526 7.722,-2.519 7.727,-2.511 7.734,-2.502 7.742,-2.492 7.752,-2.482 7.762,-2.471 7.774,-2.459 7.787,-2.447 7.801,-2.433 7.817,-2.419 7.834,-2.403 7.853,-2.386 7.873,-2.369 7.894,-2.35 7.917,-2.33 7.955,-2.297 7.997,-2.262 8.042,-2.224 8.111,-2.166 8.176,-2.112 8.236,-2.064 8.29,-2.021 8.335,-1.986 8.371,-1.959 8.396,-1.942 8.408,-1.937 8.413,-1.937 8.418,-1.938 8.422,-1.939 8.425,-1.94 8.428,-1.943 8.431,-1.945 8.433,-1.948 8.434,-1.952 8.435,-1.955 8.435,-1.96 8.435,-1.964 8.434,-1.969 8.433,-1.975 8.432,-1.98 8.43,-1.986 8.427,-1.993 8.424,-1.999 8.421,-2.006 8.417,-2.013 8.413,-2.021 8.408,-2.029 8.403,-2.037 8.397,-2.045 8.391,-2.053 8.384,-2.062 8.377,-2.071 8.37,-2.08 8.362,-2.089 8.354,-2.098 8.346,-2.108 8.337,-2.117 8.328,-2.127 8.221,-2.237 8.399,-2.184 8.577,-2.132 8.631,-2.219 8.591,-2.241 8.586,-2.244 8.579,-2.246 8.571,-2.25 8.56,-2.253 8.549,-2.257 8.536,-2.261 8.522,-2.265 8.507,-2.269 8.491,-2.273 8.474,-2.278 8.456,-2.282 8.438,-2.287 8.42,-2.292 8.4,-2.296 8.381,-2.301 8.362,-2.305 8.172,-2.347
  Top Layer region: 7.639,-2.471 7.626,-2.468 7.612,-2.459 7.596,-2.445 7.558,-2.407 7.675,-2.229 7.576,-2.13 7.487,-2.189 7.398,-2.247 7.328,-2.177 7.69,-1.907 7.763,-1.853 7.833,-1.803 7.899,-1.757 7.957,-1.717 8.008,-1.684 8.048,-1.659 8.077,-1.643 8.093,-1.637 8.134,-1.636 8.134,-1.678 8.13,-1.692 8.116,-1.719 8.095,-1.757 8.067,-1.806 8.034,-1.862 7.996,-1.925 7.956,-1.992 7.914,-2.06 7.871,-2.13 7.828,-2.198 7.787,-2.262 7.749,-2.321 7.715,-2.374 7.685,-2.417 7.662,-2.449 7.647,-2.469 hole: 1567911.505,1163623.411 1568324.763,1163208.883 1568324.763,1163208.883 1568801.267,1163858.869 1568801.267,1163858.869 1568908.084,1164008.137 1568908.084,1164008.137 1569029.153,1164183.62 1569029.153,1164183.62 1569160.294,1164378.885 1569160.294,1164378.885 1569297.329,1164587.5 1569297.329,1164587.5 1569436.079,1164803.032 1569436.079,1164803.032 1569572.363,1165019.05 1569572.363,1165019.05 1569702.005,1165229.12 1569702.005,1165229.12 1569820.823,1165426.811 1569820.823,1165426.811 1569940.177,1165629.798 1569940.177,1165629.798 1570041.018,1165805.072 1570041.018,1165805.072 1570122.13,1165952.331 1570122.13,1165952.331 1570182.301,1166071.269 1570182.301,1166071.269 1570220.315,1166161.583 1570220.315,1166161.583 1570230.635,1166195.911 1570230.635,1166195.911 1570234.96,1166222.969 1570234.96,1166222.969 1570233.139,1166242.719 1570233.139,1166242.719 1570225.02,1166255.123 1570225.02,1166255.123 1570210.451,1166260.143 1570210.451,1166260.143 1570189.282,1166257.741 1570189.282,1166257.741 1570161.359,1166247.878 1570161.359,1166247.878 1570126.531,1166230.518 1570126.531,1166230.518 1570084.647,1166205.622 1570084.647,1166205.622 1570035.555,1166173.152 1570035.555,1166173.152 1569979.102,1166133.07 1569979.102,1166133.07 1569843.509,1166029.918 1569843.509,1166029.918 1569676.655,1165895.862 1569676.655,1165895.862 1569477.326,1165730.597 1569477.326,1165730.597 1569244.306,1165533.821 1569244.306,1165533.821 1568976.383,1165305.229 1568976.383,1165305.229 1568828.953,1165178.907 1568828.953,1165178.907 1567498.247,1164037.685 1567498.247,1164037.685 1567911.505,1163623.411
  Top Layer region: 2.337,-2.449 2.237,-2.353 2.138,-2.258 2.204,-2.191 2.36,-2.338 2.416,-2.277 2.471,-2.215 2.396,-2.147 2.321,-2.078 2.129,-2.055 1.938,-2.032 1.838,-1.948 1.827,-1.938 1.816,-1.929 1.806,-1.92 1.797,-1.912 1.789,-1.903 1.781,-1.896 1.774,-1.888 1.768,-1.88 1.762,-1.873 1.758,-1.866 1.754,-1.859 1.75,-1.852 1.748,-1.845 1.746,-1.839 1.745,-1.832 1.745,-1.825 1.746,-1.818 1.747,-1.811 1.749,-1.804 1.752,-1.796 1.756,-1.789 1.76,-1.781 1.765,-1.772 1.771,-1.764 1.777,-1.755 1.785,-1.746 1.793,-1.736 1.802,-1.726 1.811,-1.715 1.822,-1.704 1.833,-1.692 1.845,-1.679 1.868,-1.656 1.878,-1.645 1.888,-1.636 1.897,-1.627 1.906,-1.618 1.915,-1.611 1.923,-1.604 1.93,-1.598 1.938,-1.593 1.945,-1.588 1.951,-1.584 1.958,-1.581 1.964,-1.579 1.97,-1.577 1.977,-1.577 1.983,-1.576 1.989,-1.577 1.994,-1.578 2.001,-1.58 2.007,-1.583 2.013,-1.586 2.019,-1.59 2.026,-1.595 2.033,-1.6 2.04,-1.607 2.047,-1.613 2.055,-1.621 2.063,-1.629 2.071,-1.638 2.09,-1.658 2.118,-1.69 2.14,-1.716 2.156,-1.738 2.165,-1.757 2.169,-1.773 2.167,-1.787 2.16,-1.801 2.149,-1.814 2.126,-1.837 2.048,-1.763 1.97,-1.69 1.914,-1.747 1.857,-1.803 1.923,-1.87 1.989,-1.936 2.195,-1.957 2.4,-1.979 2.614,-2.2 2.501,-2.374
  Top Layer region: 2.879,-2.035 2.863,-2.037 2.821,-2.037 2.644,-1.619 2.467,-1.202 2.49,-1.166 2.495,-1.158 2.5,-1.152 2.506,-1.147 2.51,-1.145 2.514,-1.144 2.519,-1.143 2.523,-1.143 2.529,-1.144 2.535,-1.146 2.541,-1.148 2.548,-1.152 2.556,-1.157 2.564,-1.163 2.574,-1.17 2.584,-1.178 2.594,-1.188 2.606,-1.198 2.619,-1.21 2.633,-1.224 2.648,-1.238 2.664,-1.254 2.681,-1.272 2.699,-1.291 2.719,-1.312 2.751,-1.346 2.787,-1.384 2.826,-1.426 2.868,-1.471 3.18,-1.808 3.099,-1.886 3.037,-1.809 2.974,-1.732 2.907,-1.768 2.84,-1.804 2.872,-1.889 2.886,-1.928 2.896,-1.96 2.901,-1.986 2.902,-2.005 2.899,-2.02 2.891,-2.03 hole: 1519081.289,1167733.318 1519164.349,1167739.009 1519164.349,1167739.009 1519253.177,1167763.752 1519253.177,1167763.752 1519349.445,1167805.925 1519349.445,1167805.925 1519454.825,1167863.907 1519454.825,1167863.907 1519570.987,1167936.077 1519570.987,1167936.077 1519951.479,1168181.441 1519951.479,1168181.441 1517360.933,1171102.695 1517360.933,1171102.695 1518070.355,1169391.751 1518070.355,1169391.751 1518200.269,1169080.883 1518200.269,1169080.883 1518317.566,1168806.898 1518317.566,1168806.898 1518423.919,1168568.176 1518423.919,1168568.176 1518520.999,1168363.095 1518520.999,1168363.095 1518610.476,1168190.035 1518610.476,1168190.035 1518694.022,1168047.373 1518694.022,1168047.373 1518773.309,1167933.49 1518773.309,1167933.49 1518850.008,1167846.765 1518850.008,1167846.765 1518925.79,1167785.575 1518925.79,1167785.575 1519002.327,1167748.299 1519002.327,1167748.299 1519081.289,1167733.318
  Top Layer region: 7.039,-1.955 7.018,-1.963 7.002,-1.957 6.987,-1.94 6.966,-1.906 7.19,-1.57 7.413,-1.233 7.374,-1.194 7.359,-1.176 7.346,-1.154 7.338,-1.132 7.335,-1.112 7.341,-1.081 7.354,-1.068 7.379,-1.077 7.42,-1.101 7.471,-1.135 7.526,-1.175 7.58,-1.217 7.625,-1.255 7.656,-1.286 7.668,-1.305 7.668,-1.338 7.579,-1.328 7.49,-1.319 7.279,-1.636 7.207,-1.744 7.148,-1.828 7.102,-1.89 7.067,-1.931
  Top Layer region: 3.677,-1.601 3.657,-1.603 3.611,-1.603 3.587,-1.541 3.576,-1.51 3.558,-1.459 3.534,-1.392 3.506,-1.313 3.475,-1.223 3.442,-1.128 3.436,-1.109 3.306,-0.732 3.396,-0.699 3.463,-0.674 3.504,-0.659 3.515,-0.655 3.529,-0.651 3.543,-0.648 3.559,-0.644 3.575,-0.642 3.591,-0.64 3.607,-0.638 3.621,-0.637 3.688,-0.634 3.746,-0.797 3.758,-0.832 3.768,-0.866 3.778,-0.9 3.787,-0.933 3.794,-0.963 3.799,-0.989 3.803,-1.011 3.804,-1.028 3.804,-1.096 3.721,-1.124 4.01,-1.469 3.955,-1.49 3.914,-1.501 3.892,-1.498 3.871,-1.468 3.851,-1.439 3.831,-1.411 3.812,-1.386 3.794,-1.361 3.777,-1.339 3.76,-1.318 3.744,-1.299 3.729,-1.281 3.715,-1.265 3.701,-1.251 3.689,-1.238 3.677,-1.227 3.666,-1.218 3.656,-1.211 3.647,-1.205 3.638,-1.201 3.631,-1.198 3.625,-1.198 3.62,-1.199 3.615,-1.202 3.612,-1.206 3.61,-1.213 3.608,-1.221 3.608,-1.231 3.609,-1.243 3.611,-1.256 3.614,-1.272 3.618,-1.289 3.623,-1.308 3.63,-1.329 3.637,-1.352 3.663,-1.429 3.682,-1.489 3.694,-1.533 3.7,-1.564 3.698,-1.584 3.691,-1.596 hole: 1526471.405,1173759.027 1528028.171,1174469.973 1528028.171,1174469.973 1527812.271,1175165.425 1527812.271,1175165.425 1527763.223,1175320.468 1527763.223,1175320.468 1527706.401,1175494.748 1527706.401,1175494.748 1527643.839,1175682.334 1527643.839,1175682.334 1527577.575,1175877.292 1527577.575,1175877.292 1527509.644,1176073.691 1527509.644,1176073.691 1527442.082,1176265.598 1527442.082,1176265.598 1527376.925,1176447.082 1527376.925,1176447.082 1527316.209,1176612.209 1527316.209,1176612.209 1527091.292,1177136.561 1527091.292,1177136.561 1526944.099,1177342.205 1526944.099,1177342.205 1526850.294,1177310.463 1526850.294,1177310.463 1526662.477,1177239.716 1526662.477,1177239.716 1526407.889,1177140.394 1526407.889,1177140.394 1526113.773,1177022.927 1526113.773,1177022.927 1525374.633,1176724.985 1525374.633,1176724.985 1525923.019,1175241.879 1525923.019,1175241.879 1526471.405,1173759.027
  Top Layer region: 6.352,-1.569 6.333,-1.6 6.244,-1.565 6.39,-1.18 6.42,-1.101 6.446,-1.033 6.468,-0.975 6.486,-0.926 6.5,-0.886 6.512,-0.853 6.519,-0.827 6.524,-0.807 6.526,-0.792 6.524,-0.782 6.521,-0.774 6.514,-0.769 6.505,-0.766 6.494,-0.763 6.481,-0.761 6.465,-0.757 6.395,-0.739 6.417,-0.703 6.42,-0.699 6.423,-0.695 6.426,-0.691 6.43,-0.688 6.433,-0.685 6.437,-0.682 6.44,-0.679 6.444,-0.677 6.449,-0.675 6.453,-0.673 6.458,-0.672 6.463,-0.671 6.469,-0.671 6.474,-0.67 6.481,-0.67 6.487,-0.671 6.494,-0.671 6.501,-0.673 6.509,-0.674 6.517,-0.676 6.526,-0.678 6.536,-0.68 6.545,-0.683 6.556,-0.686 6.567,-0.689 6.578,-0.693 6.59,-0.697 6.603,-0.702 6.616,-0.706 6.63,-0.711 6.645,-0.717 6.66,-0.723 6.804,-0.778 6.779,-0.851 6.629,-0.851 6.5,-1.195 6.474,-1.264 6.449,-1.33 6.425,-1.392 6.404,-1.446 6.385,-1.493 6.37,-1.53 6.359,-1.556
  Top Layer region: 5.896,-1.4 5.911,-1.446 5.767,-1.422 5.709,-1.412 5.66,-1.401 5.623,-1.391 5.606,-1.383 5.605,-1.38 5.605,-1.372 5.605,-1.361 5.607,-1.345 5.609,-1.327 5.612,-1.305 5.615,-1.281 5.619,-1.254 5.624,-1.224 5.628,-1.193 5.634,-1.16 5.639,-1.125 5.645,-1.089 5.652,-1.052 5.658,-1.015 5.665,-0.976 5.672,-0.938 5.679,-0.9 5.686,-0.862 5.693,-0.824 5.7,-0.787 5.706,-0.752 5.713,-0.718 5.72,-0.685 5.726,-0.654 5.732,-0.626 5.738,-0.599 5.743,-0.576 5.748,-0.555 5.752,-0.538 5.756,-0.524 5.759,-0.513 5.773,-0.475 5.896,-0.504 5.946,-0.515 5.99,-0.524 6.025,-0.531 6.044,-0.533 6.054,-0.538 6.062,-0.549 6.067,-0.566 6.069,-0.586 6.069,-0.637 5.836,-0.594 5.836,-0.643 5.835,-0.655 5.834,-0.671 5.832,-0.688 5.83,-0.708 5.827,-0.73 5.823,-0.752 5.819,-0.774 5.815,-0.796 5.795,-0.898 5.969,-0.942 5.969,-1.04 5.87,-1.019 5.772,-0.997 5.754,-1.074 5.75,-1.092 5.746,-1.111 5.742,-1.132 5.738,-1.153 5.735,-1.174 5.732,-1.195 5.729,-1.215 5.727,-1.233 5.719,-1.314 5.8,-1.334 5.881,-1.354
  Top Layer region: 4.298,-1.411 4.227,-1.339 4.167,-0.947 4.106,-0.555 4.175,-0.471 4.298,-0.458 4.347,-0.453 4.392,-0.447 4.426,-0.443 4.448,-0.439 4.452,-0.439 4.456,-0.44 4.461,-0.442 4.465,-0.445 4.469,-0.449 4.473,-0.453 4.477,-0.459 4.481,-0.466 4.486,-0.474 4.49,-0.483 4.494,-0.493 4.498,-0.503 4.502,-0.515 4.507,-0.528 4.511,-0.543 4.515,-0.558 4.519,-0.574 4.524,-0.592 4.528,-0.61 4.533,-0.63 4.537,-0.651 4.541,-0.673 4.546,-0.696 4.551,-0.721 4.555,-0.746 4.56,-0.773 4.565,-0.801 4.57,-0.831 4.575,-0.861 4.58,-0.893 4.585,-0.926 4.587,-0.943 4.641,-1.302 4.621,-1.333 4.602,-1.365 hole: 1535029.918,1171923.202 1535218.935,1171850.93 1535218.935,1171850.93 1535408.903,1171857.583 1535408.903,1171857.583 1536215.353,1172060.275 1536215.353,1172060.275 1535730.721,1175546.679 1535730.721,1175546.679 1535245.835,1179033.083 1535245.835,1179033.083 1533348.709,1179033.083 1533348.709,1179033.083 1533349.979,1178448.375 1533349.979,1178448.375 1533363.229,1177791.241 1533363.229,1177791.241 1533399.089,1177143.685 1533399.089,1177143.685 1533456.013,1176510.662 1533456.013,1176510.662 1533532.454,1175897.124 1533532.454,1175897.124 1533626.864,1175308.025 1533626.864,1175308.025 1533737.697,1174748.319 1533737.697,1174748.319 1533863.405,1174222.959 1533863.405,1174222.959 1534002.442,1173736.898 1534002.442,1173736.898 1534153.259,1173295.089 1534153.259,1173295.089 1534314.311,1172902.486 1534314.311,1172902.486 1534484.05,1172564.043 1534484.05,1172564.043 1534660.929,1172284.712 1534660.929,1172284.712 1534843.4,1172069.447 1534843.4,1172069.447 1535029.918,1171923.202
  Top Layer region: 5.336,-1.33 5.336,-1.374 5.253,-1.349 5.163,-1.167 5.074,-0.985 5.07,-1.336 5.011,-1.336 4.953,-1.336 4.962,-0.91 4.964,-0.823 4.967,-0.741 4.97,-0.665 4.973,-0.596 4.977,-0.537 4.98,-0.491 4.984,-0.457 4.987,-0.44 5.003,-0.395 5.086,-0.423 5.075,-0.579 5.074,-0.597 5.073,-0.613 5.072,-0.628 5.071,-0.643 5.071,-0.656 5.071,-0.668 5.071,-0.679 5.071,-0.688 5.071,-0.697 5.072,-0.704 5.073,-0.711 5.075,-0.716 5.076,-0.72 5.078,-0.723 5.08,-0.725 5.083,-0.726 5.085,-0.725 5.088,-0.724 5.092,-0.721 5.096,-0.717 5.1,-0.712 5.104,-0.706 5.109,-0.699 5.114,-0.691 5.12,-0.681 5.126,-0.671 5.132,-0.659 5.139,-0.647 5.146,-0.633 5.153,-0.618 5.161,-0.602 5.17,-0.584 5.242,-0.434 5.37,-0.434 5.27,-0.633 5.259,-0.655 5.249,-0.676 5.239,-0.695 5.23,-0.714 5.222,-0.731 5.214,-0.747 5.208,-0.763 5.201,-0.778 5.196,-0.791 5.191,-0.805 5.187,-0.818 5.184,-0.83 5.181,-0.842 5.179,-0.854 5.177,-0.865 5.177,-0.876 5.177,-0.888 5.177,-0.899 5.178,-0.91 5.18,-0.922 5.183,-0.934 5.186,-0.946 5.19,-0.959 5.194,-0.972 5.199,-0.986 5.205,-1.001 5.211,-1.016 5.218,-1.032 5.226,-1.049 5.234,-1.067 5.243,-1.086 5.253,-1.107 5.269,-1.144 5.285,-1.18 5.299,-1.214 5.311,-1.246 5.321,-1.275 5.329,-1.299 5.334,-1.317
IMPORTED_IMAGE#2 [mm]
  Top Layer region: 1698 vertices and 0 holes, not listed, extent -0.026,-9.218 9.968,0.001
"JST- XH 2.54MM SOKET 2LI" [mil]
  round 60 hole 36: 1(-48.82,0) 2(51.18,0)
  silkscreen extent -149,-100 151,100
LED-TH_BD5.0_RED [mil]
  round 65 hole 38: 1(0,50) 2(0,-50)
  silkscreen extent -102,-88 102,102
MPU6050 [mil]
  round 74 hole 40: 1(-450,0) 2(-350,0) 3(-250,0) 4(-150,0) 5(-50,0) 6(50,0) 7(150,0) 8(250,0) 9(350,0) 10(450,0)
  silkscreen extent -500,-50 500,550
NEW_FOOTPRINT [mm]
NRF24L01_ADAPTER3V3 [mil]
  round 60 hole 36: 1(-240.16,-275.59) 3(246.06,-246.06) 4(246.06,-147.64) 5(246.06,-49.21) 6(246.06,49.21) 7(246.06,147.64) 8(246.06,246.06)
  rect 60x60 hole 36: 2(-141.73,-275.59)
  silkscreen extent -343,-368 685,366
R_AXIAL-0.3 [mil]
  round 74 hole 35.4: 1(-150,0) 2(150,0)
  silkscreen extent -110,-30 110,30
RAD-0.1 [mil]
  round 47 hole 28: 1(-50,0) 2(50,0)
  silkscreen extent -100,-50 100,50
TO-220-3_L10.0-W4.5-P2.54-L [mm]
  rect 1.8x2.6 hole 1.2: 1(-2.54,0.005)
  oval 1.8x2.6 hole 1.2: 2(0,0.005) 3(2.54,-0.005)
  silkscreen extent -5.3,-2.73 5.3,3.09
? [mm]

## Free pads (board coordinates)
  round 1.7 hole 1.3: 1(86.6,111.6) 2(86.6,107) 3(86.6,102.4)
  round 1.524 hole 0.914: 1(108.55,96.81) 1(108.55,106.97) 2(83.15,137.45) 2(83.15,145.07) 6(118.6,98.1) 6(126.1,101.1)
  round 1.93 hole 1.102: 13(89.5,132.37) 13(103.47,132.37) 14(89.5,129.83) 14(103.47,129.83) P$12(135.22,128.56) P$12(150.46,128.56)